# Altium PCB VDMEDA_DisplaySlave.PcbDoc
Units mm, origin at the board's own origin, x right, y up, seen from the top; angles counter-clockwise.
Board outline 152.4 x 101.6 mm, 2 copper layers (Top Layer, Bottom Layer); 2 components, 12 nets, 28 pads, 0 vias.
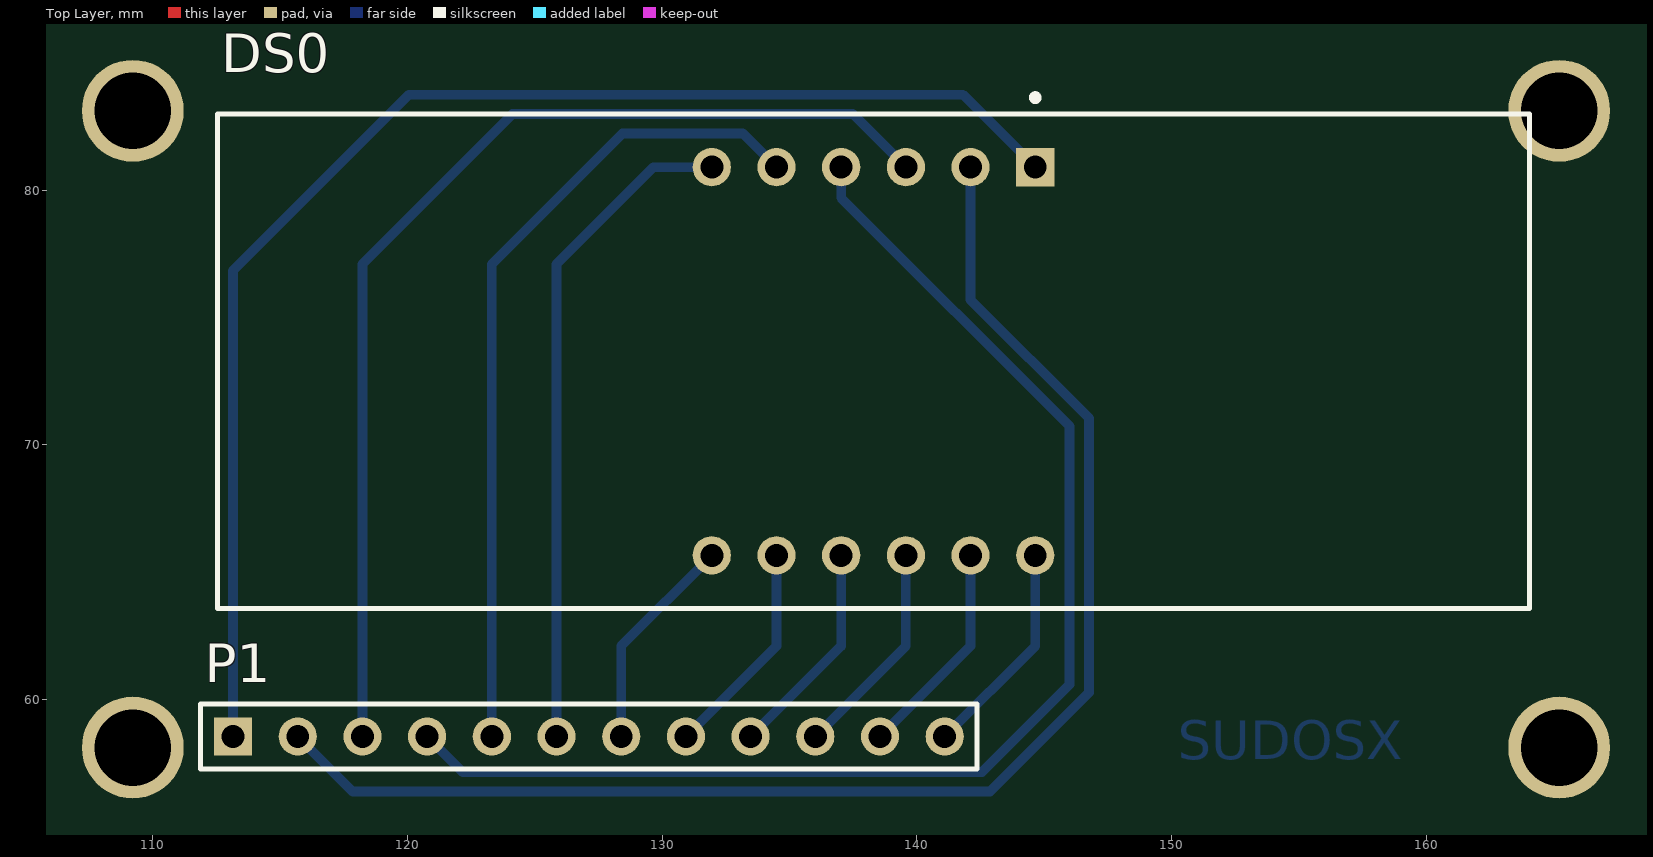
[diagram p0: Top Layer view]
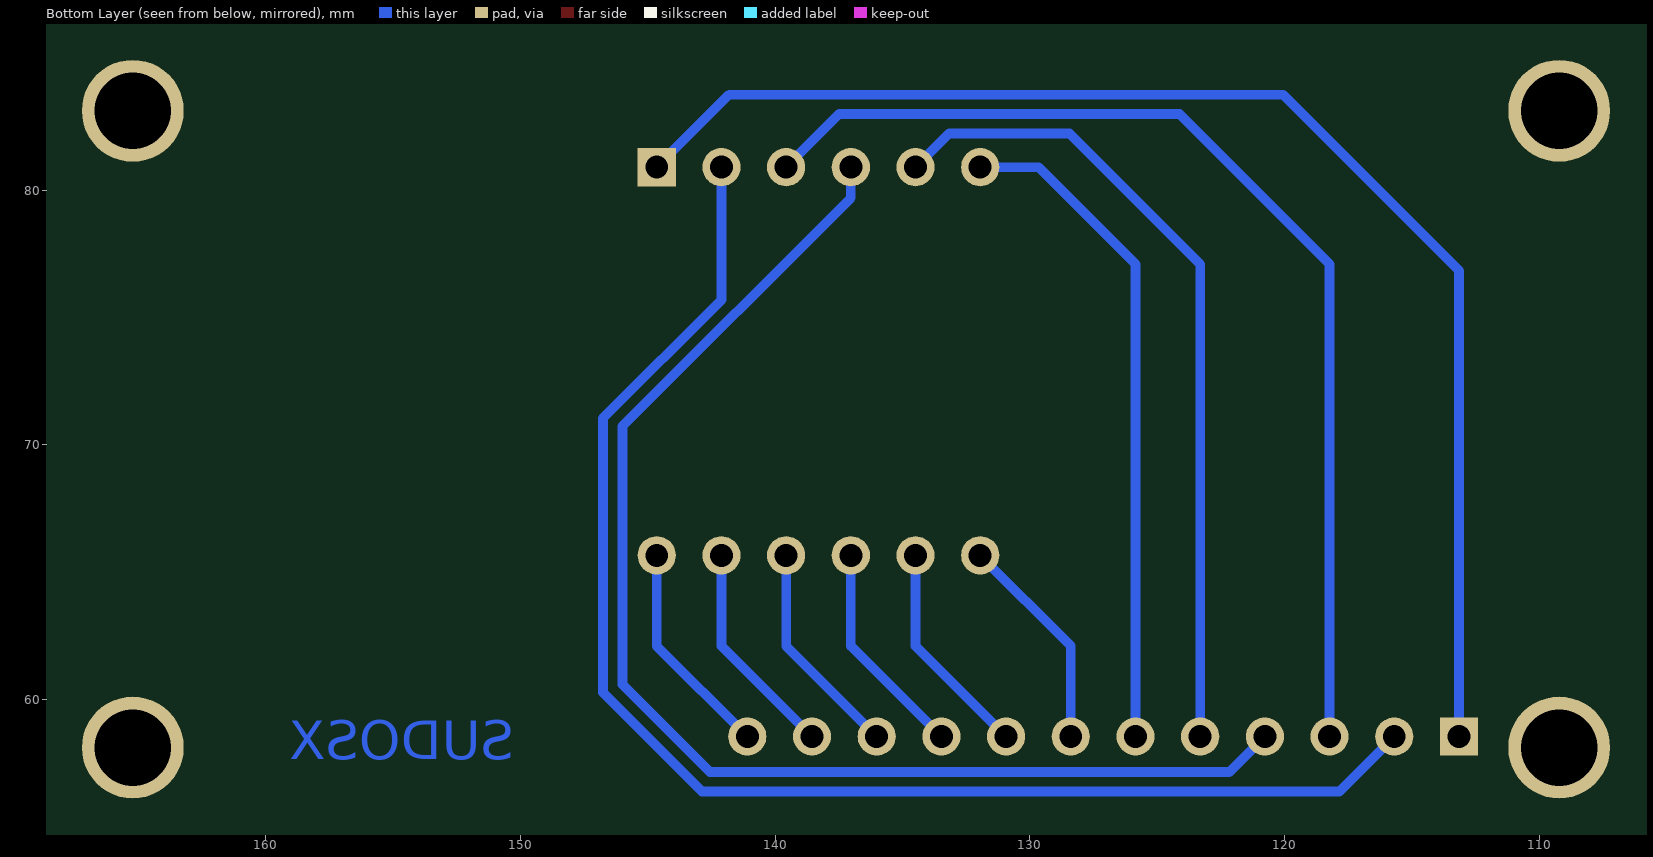
[diagram p1: Bottom Layer view, seen from below]

## Layer stack, top to bottom
Top Solder: solder mask 0.0102, Solder Resist, Dk 3.5
Top Layer: signal copper 0.0356
Dielectric 1: dielectric 0.32, FR-4, Dk 4.8
Bottom Layer: signal copper 0.0356
Bottom Solder: solder mask 0.0102, Solder Resist, Dk 3.5

## Board outline
25.4,25.4 177.8,25.4 177.8,127 25.4,127

## Design rules (kind name [scope] priority, off if disabled: settings)
Clearance [All] p1: gap=0.381
PolygonConnect [All] p1: connectstyle=Relief reliefconductorwidth=0.254 reliefentries=4 polygonreliefangle="90 Angle" airgapwidth=0.254
RoomDefinition VDMEDA_Display2 [InComponentClass('VDMEDA_Display2')] p1: confinementstyle=ConfineIn formatcopy=TRUE lockcomponents=FALSE outline 168.402,55.118 168.402,85.979 106.426,85.979 106.426,55.118
RoutingLayers [All] p1: top layer_v5=FALSE bottom layer_v5=TRUE
RoutingVias [All] p1: holewidth=0.711 width=1.27 viastyle="Through Hole" minholewidth=0.711 minwidth=1.27 maxholewidth=0.711 maxwidth=1.27
SolderMaskExpansion [All] p1: expansion=0.102
UnpouredPolygon [All] p1: allowunpoured=FALSE
Width [All] p1: maxlimit=0.635 minlimit=0.381 preferedwidth=0.381
28 further rules are at their usual default settings.

## Components (designator, comment, footprint, x,y, rotation, side; value= is the part's Value field where it differs from the comment)
DS0 "HDSP-B03E" B-88 138.303,73.279 r180 top
P1 "Header 12" HDR1X12 113.157,58.547 r0 top

## Footprints (in the part's own frame and the unit in brackets; to place one, negate y for a bottom-side part, rotate by r counter-clockwise, add the part's x,y. Pads: shape width x height; smd on the part's side, far side on the other; paste and mask are expansions set on the pad)
B-88 [mm] "LED, 7-Segment Display, 14.22 mm, Four Digit, 88:88; 12 Leads; Row Space 15.24 mm; Pitch 2.54 mm"
  rect 1.5x1.5 hole 0.9: 1(-6.35,-7.62)
  round 1.5 hole 0.9: 2(-3.81,-7.62) 3(-1.27,-7.62) 4(1.27,-7.62) 5(3.81,-7.62) 6(6.35,-7.62) 7(6.35,7.62) 8(3.81,7.62) 9(1.27,7.62) 10(-1.27,7.62) 11(-3.81,7.62) 12(-6.35,7.62)
  silkscreen extent -25.75,-10.47 25.75,9.7
HDR1X12 [mm] "Connector; Header; 12 Position"
  rect 1.5x1.5 hole 0.9: 1(0,0)
  round 1.5 hole 0.9: 2(2.54,0) 3(5.08,0) 4(7.62,0) 5(10.16,0) 6(12.7,0) 7(15.24,0) 8(17.78,0) 9(20.32,0) 10(22.86,0) 11(25.4,0) 12(27.94,0)
  silkscreen extent -1.27,-1.27 29.21,1.27

## Part data
DS0: "14.22 mm GaP HER, Untinted, 88:88 4-Digit 7-Segment Display: CC, Gray Surface"
P1: "Header, 12-Pin"

## Free pads (board coordinates)
  round 4 hole 3: -(109.222,58.111) -(109.222,83.111) -(165.222,58.111) -(165.222,83.111)

## Nets (pads, with @x,y where several pads share a name; then routed paths per layer and width w, separated by ;. In a path a pad name is that pad's centre, name@x,y a point inside that pad or via, vN(x,y) a via of type N, cw(c..) or ccw(c..) an arc to the next point about the centre after c; other vN are vias at no path point)
NetDS0_1: DS0.1 P1.1 | length 53.8
  Bottom Layer w0.381: P1.1 113.157,76.835 120.067,83.745 141.807,83.745 DS0.1
NetDS0_2: DS0.2 P1.2 | length 56.1
  Bottom Layer w0.381: P1.2 117.856,56.388 142.875,56.388 146.761,60.274 146.761,71.044 142.113,75.692 DS0.2
NetDS0_3: DS0.3 P1.3 | length 43.2
  Bottom Layer w0.381: P1.3 118.237,77.089 124.131,82.983 137.489,82.983 DS0.3
NetDS0_4: DS0.4 P1.4 | length 51.2
  Bottom Layer w0.381: P1.4 122.174,57.15 142.559,57.15 145.999,60.59 145.999,70.728 137.033,79.694 DS0.4
NetDS0_5: DS0.5 P1.5 | length 32.4
  Bottom Layer w0.381: P1.5 123.317,77.089 128.449,82.221 133.171,82.221 DS0.5
NetDS0_6: DS0.6 P1.6 | length 26.2
  Bottom Layer w0.381: P1.6 125.857,77.089 129.667,80.899 DS0.6
NetDS0_7: DS0.7 P1.7 | length 8.6
  Bottom Layer w0.381: P1.7 128.397,62.103 DS0.7
NetDS0_8: DS0.8 P1.8 | length 8.6
  Bottom Layer w0.381: P1.8 134.493,62.103 DS0.8
NetDS0_9: DS0.9 P1.9 | length 8.6
  Bottom Layer w0.381: P1.9 137.033,62.103 DS0.9
NetDS0_10: DS0.10 P1.10 | length 8.6
  Bottom Layer w0.381: P1.10 139.573,62.103 DS0.10
NetDS0_11: DS0.11 P1.11 | length 8.6
  Bottom Layer w0.381: P1.11 142.113,62.103 DS0.11
NetDS0_12: DS0.12 P1.12 | length 8.6
  Bottom Layer w0.381: P1.12 144.653,62.103 DS0.12

## Other copper
Bottom Layer:
  text "SUDOSX" at 150.241,57.658 h1.52

## Silkscreen, mask and mechanical layers (free items; w line width, h text height)
Mechanical 1:
  lines w0.254: 106.426,55.118 106.426,86.233 168.148,86.233 168.275,86.106 168.275,55.118 106.426,55.118